# Altium PCB DAC_board_PCB.PcbDoc (part 2 of 2)
Units mm, origin at the board's own origin, x right, y up, seen from the top; angles counter-clockwise.
Board outline 50 x 100 mm, 4 copper layers (Top Layer, Int1 (GND), Int2 (PWR), Bottom Layer), stack 1.369 mm thick; 72 components, 43 nets, 314 pads, 85 vias.
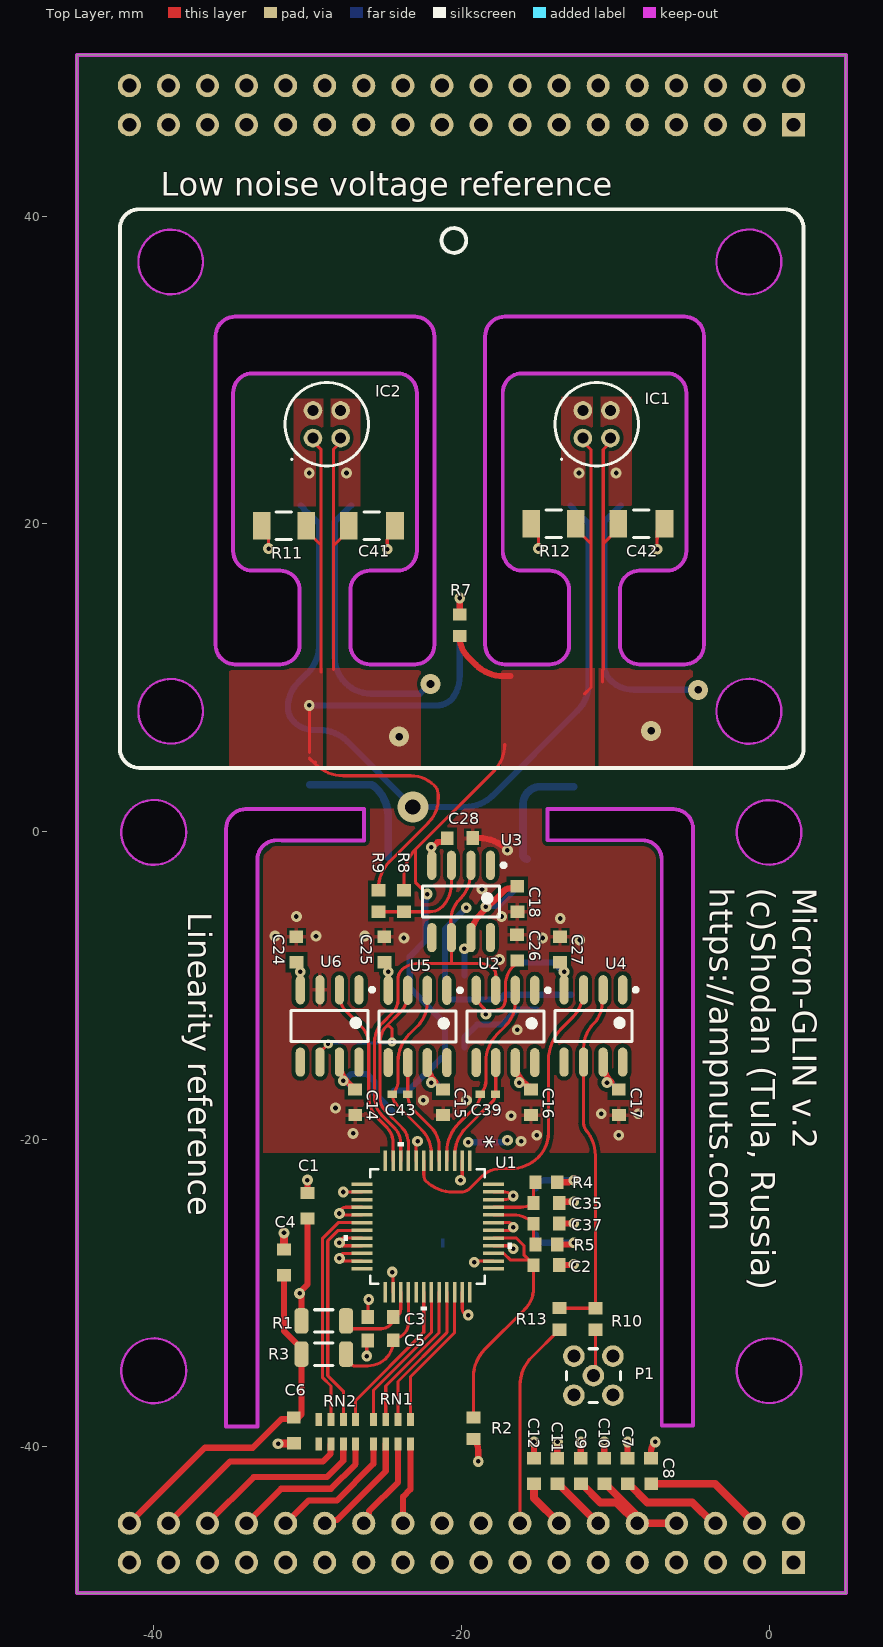
[diagram p0: Top Layer view]

## Other copper (continued)
Bottom Layer: (continued)
  pour cut-out: -25.066,16.966 -32.432,16.966 -32.432,10.489 -23.796,10.489
  pour cut-out: -8.175,16.712 -14.271,16.712 -14.271,10.489 -7.032,10.489

## Silkscreen, mask and mechanical layers (free items; w line width, h text height)
Top Overlay:
  circle w0.254: c-20.494,38.429 r0.803
  lines w0.254: -42.211,5.409 ccw(c-40.941,5.409) -40.941,4.139 0.969,4.139 ccw(c0.969,5.409) 2.239,5.409 2.239,39.191 ccw(c0.969,39.191) 0.969,40.461 -40.052,40.461 -40.941,40.461 ccw(c-40.941,39.191) -42.211,39.191 -42.211,5.409
  text "Low noise voltage reference" at -39.544,41.35 h1.52
  text "Micron-GLIN v.2 / (c)Shodan (Tula, Russia) / https://ampnuts.com" at -4.397,-3.64 h2.7 r270
  text "Linearity reference" at -37.766,-5.259 h1.52 r270

## Dimensions
-28.758,26.482 to -42.211,39.191 on Mechanical 1
1.585,-47.506 to 4.995,-49.506 on Mechanical 1
-41.595,-47.506 to -45.005,-49.506 on Mechanical 1
-41.595,-47.506 to -45.005,-49.506 on Mechanical 1
-41.595,48.494 to -44.624,50.494 on Mechanical 1
-41.595,48.494 to -45.005,49.224 on Mechanical 1
1.585,48.494 to 4.995,50.494 on Mechanical 1

## Text inside footprints (layer, text, board x,y; h text height)
P2: Bottom Overlay "36" at -43.119,-45.474 h0.75; Bottom Overlay "35" at -43.119,-48.014 h0.75; Bottom Overlay "1" at 3.871,-47.633 h0.75; Bottom Overlay "2" at 3.998,-45.22 h0.75
P3: Bottom Overlay "36" at -43.119,47.986 h0.75; Bottom Overlay "35" at -43.119,45.446 h0.75; Bottom Overlay "1" at 4.125,45.446 h0.75; Bottom Overlay "2" at 4.271,47.954 h0.75
U1: Top Overlay "*" at -19.097,-19.737 h1.27 r270; Mechanical 13 "*" at -19.838,-22.141 h1.27 r270